# Altium PCB PCB_A5R_2x4_V-CUT.PcbDoc
Units mm, origin at the board's own origin, x right, y up, seen from the top; angles counter-clockwise.
Board outline 153.6 x 133.5 mm, 4 copper layers (Top Layer 1, Top Layer, Bottom Layer, Bottom Layer 1), stack 0.603 mm thick; 4 components, 0 nets, 4 pads, 0 vias.
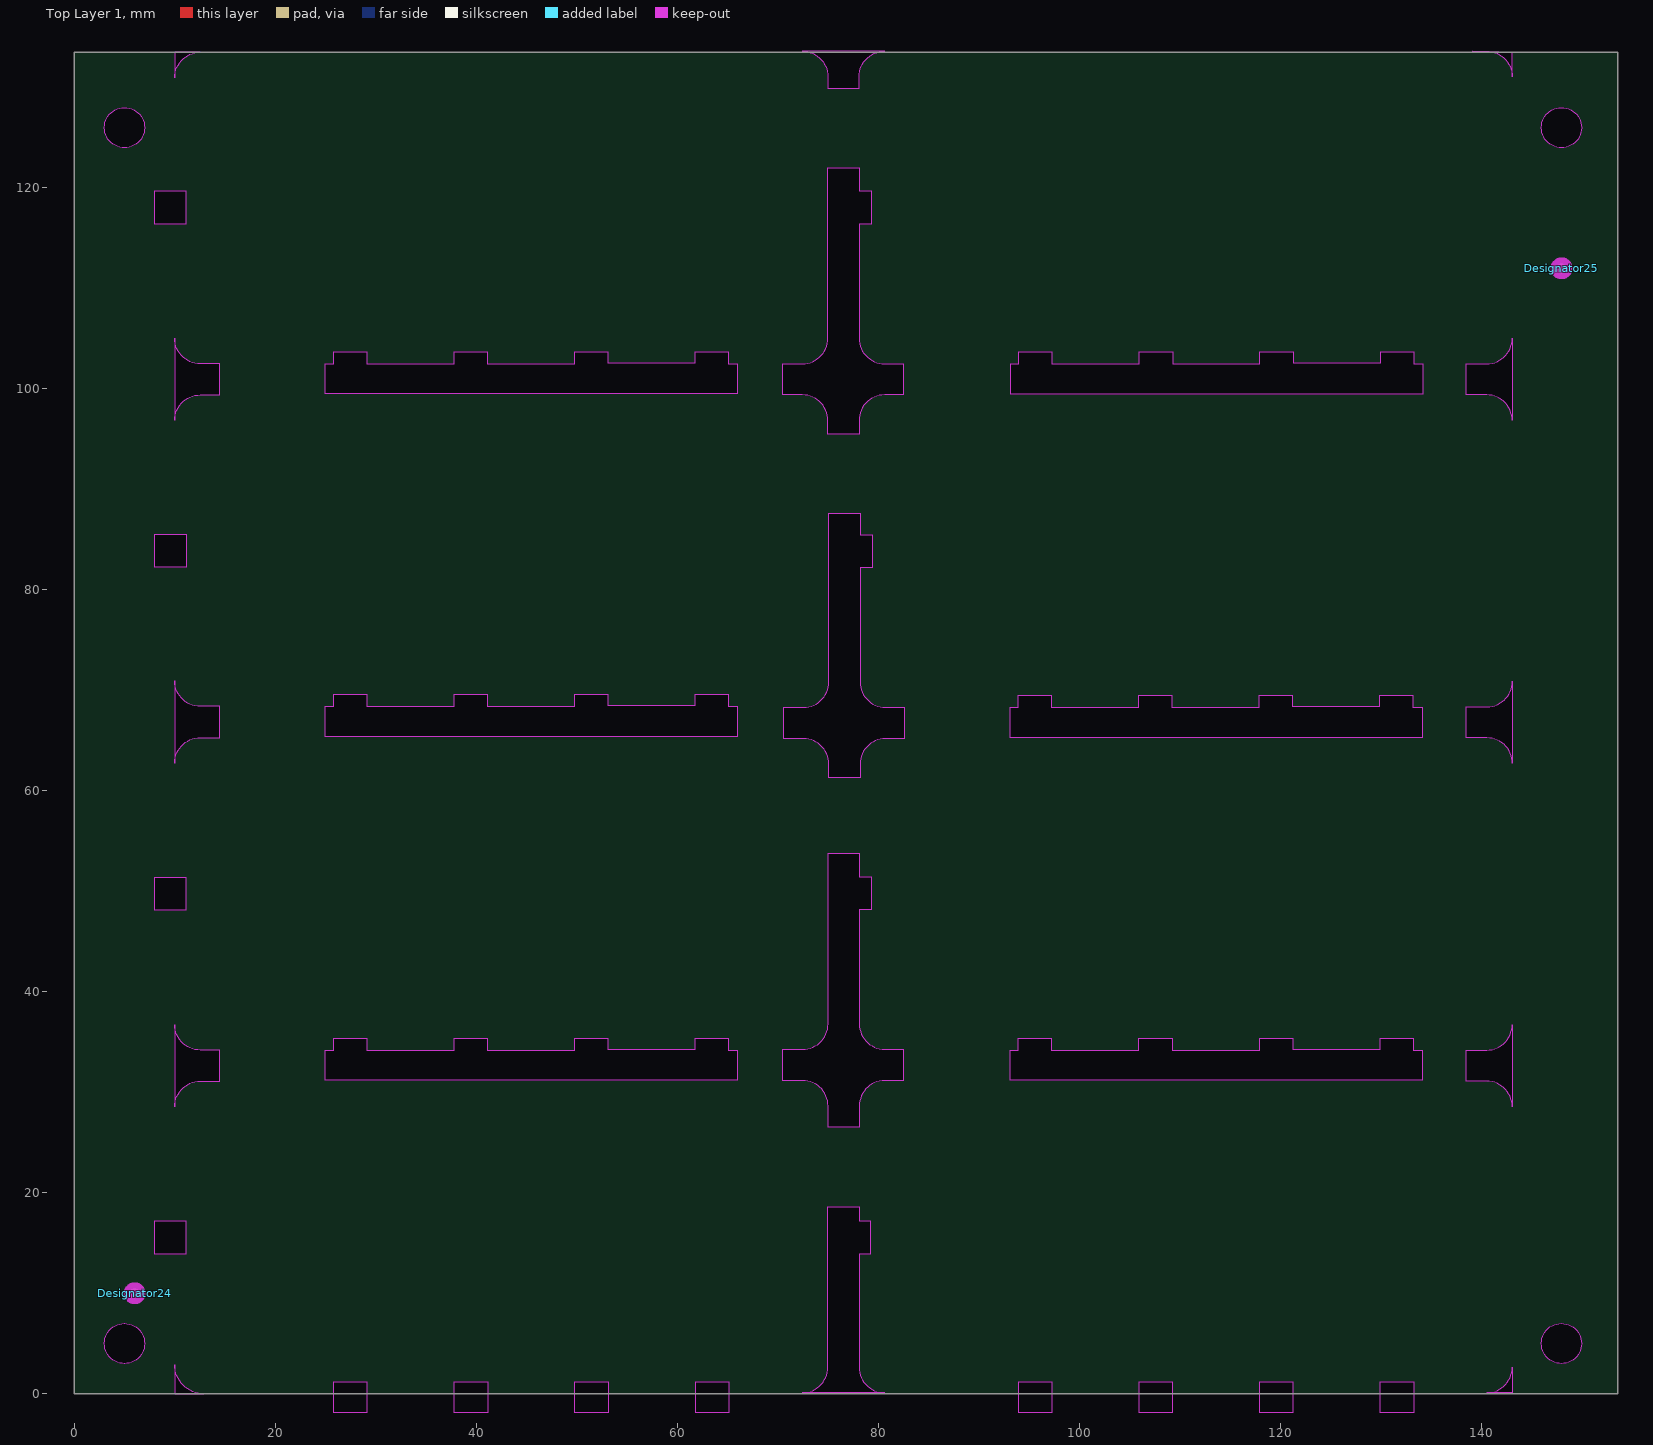
[diagram p0: Top Layer 1 view]
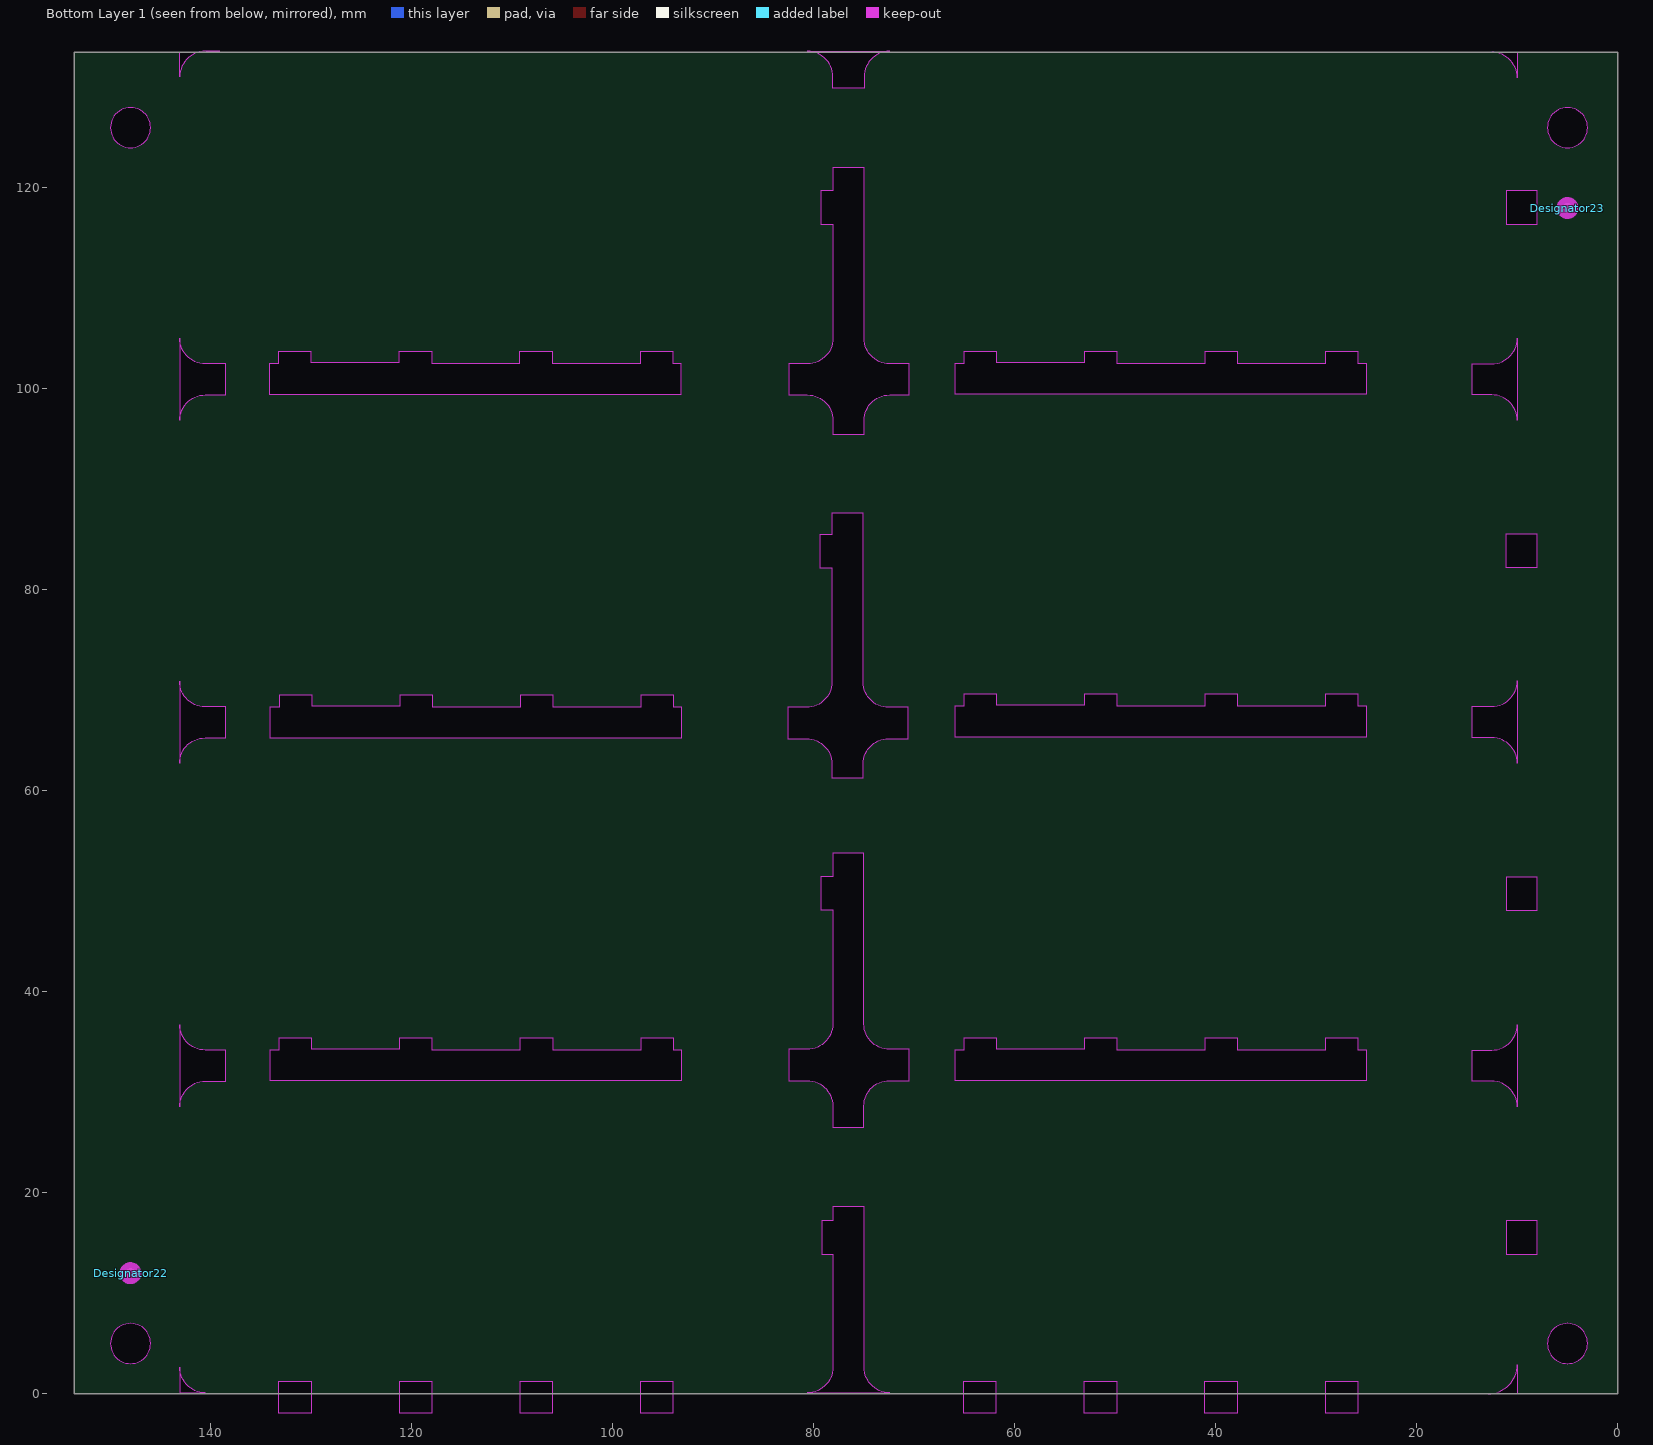
[diagram p1: Bottom Layer 1 view, seen from below]
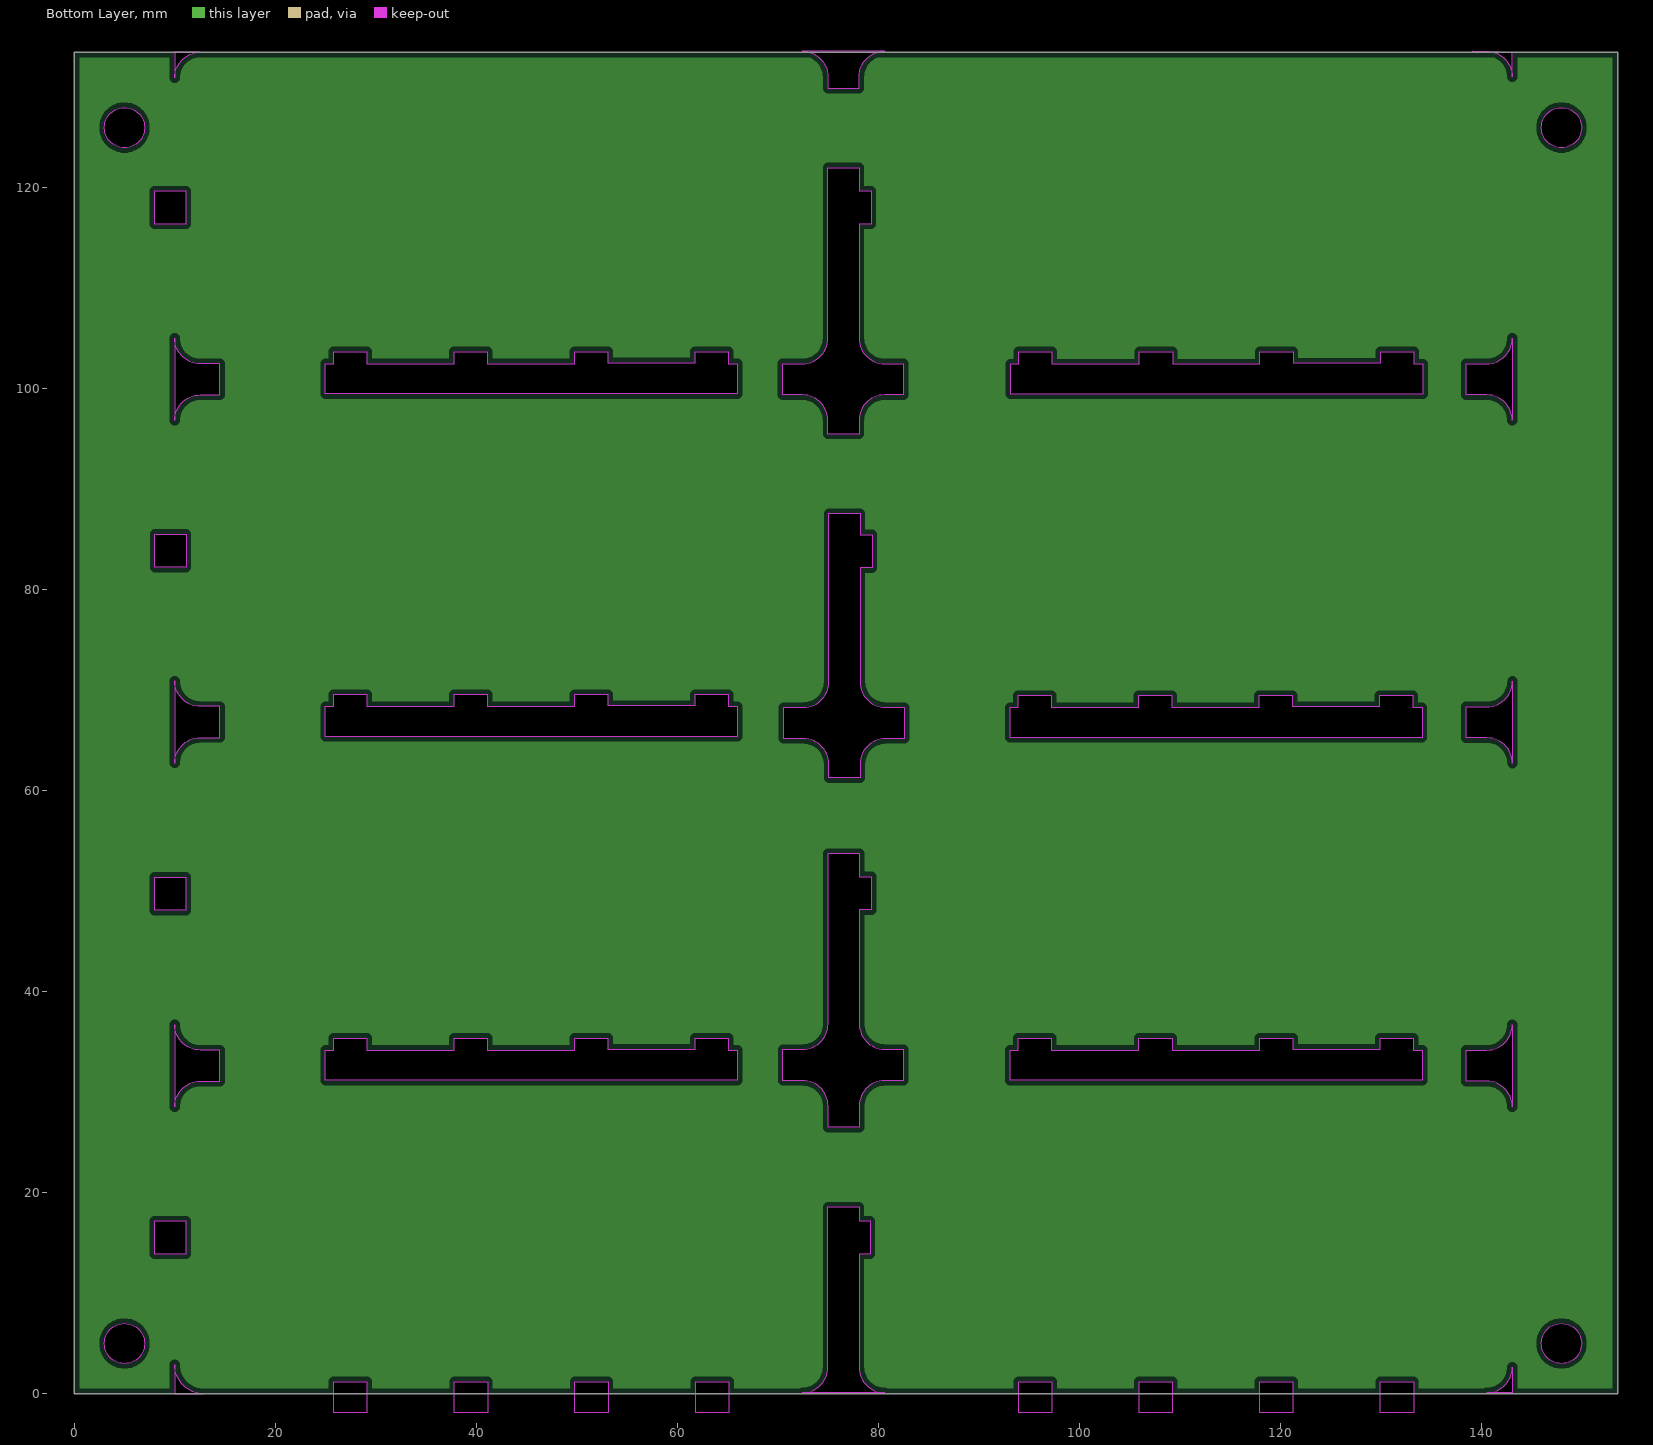
[diagram p2: Bottom Layer, clearances drawn from the general rule]

## Layer stack, top to bottom
Top Solder: solder mask 0.0102, Solder Resist, Dk 3.5
Top Layer 1: signal copper 0.035
Dielectric 2: prepreg 0.0711, PP-006, Dk 4.1
Top Layer: signal copper 0.0356
Dielectric 1: dielectric 0.32, FR-4, Dk 4.8
Bottom Layer: plane copper 0.0356
Dielectric 3: prepreg 0.0711, PP-006, Dk 4.1
Bottom Layer 1: signal copper 0.035
Bottom Solder: solder mask 0.0102, Solder Resist, Dk 3.5

## Board outline
0,0 153.6,0 153.6,133.5 0,133.5
cut-out: 129.984,1.211 133.284,1.211 133.284,-1.889 129.984,-1.889
cut-out: 117.98,1.207 121.28,1.207 121.28,-1.893 117.98,-1.893
cut-out: 105.98,1.199 109.28,1.199 109.28,-1.901 105.98,-1.901
cut-out: 93.972,1.201 97.272,1.201 97.272,-1.899 93.972,-1.899
cut-out: 61.834,1.206 65.134,1.206 65.134,-1.894 61.834,-1.894
cut-out: 49.825,1.217 53.125,1.217 53.125,-1.883 49.825,-1.883
cut-out: 37.825,1.207 41.125,1.207 41.125,-1.893 37.825,-1.893
cut-out: 25.8,1.2 29.1,1.2 29.1,-1.9 25.8,-1.9
cut-out: 8,17.2 11.1,17.2 11.1,13.9 8,13.9
cut-out: 8,51.4 11.1,51.4 11.1,48.1 8,48.1
cut-out: 8.023,85.544 11.123,85.544 11.123,82.244 8.023,82.244
cut-out: 8,119.7 11.1,119.7 11.1,116.4 8,116.4
cut-out: 146,125.97 146,126.019 cw(c147.981,126.019) 147.981,128 148,128 cw(c148,126) 150,126 cw(c148,126) 148,124 147.995,124 cw(c147.995,125.995) 146,125.995
cut-out: 146,4.97 146,5.019 cw(c147.981,5.019) 147.981,7 148,7 cw(c148,5) 150,5 cw(c148,5) 148,3 147.995,3 cw(c147.995,4.995) 146,4.995
cut-out: 3,4.97 3,5.019 cw(c4.981,5.019) 4.981,7 5,7 cw(c5,5) 7,5 cw(c5,5) 5,3 4.995,3 cw(c4.995,4.995) 3,4.995
cut-out: 3,125.97 3,126.019 cw(c4.981,126.019) 4.981,128 5,128 cw(c5,126) 7,126 cw(c5,126) 5,124 4.995,124 cw(c4.995,125.995) 3,125.995
cut-out: 140.56,0.1 ccw(c140.56,2.64) 143.1,2.64 143.1,0.1
cut-out: 139.1,133.6 140.56,133.6 cw(c140.56,131.06) 143.1,131.06 143.1,133.472
cut-out: 72.46,133.6 cw(c72.46,131.06) 75,131.06 75,129.9 78.1,129.9 78.1,131.06 cw(c80.64,131.06) 80.64,133.6
cut-out: 10,0 12.9,0 cw(c12.9,2.9) 10,2.9
cut-out: 10,133.5 10,130.96 cw(c12.54,130.96) 12.54,133.5
cut-out: 75,18.6 78.1,18.6 78.1,17.2 79.2,17.2 79.2,13.9 78.1,13.9 78.1,2.64 ccw(c80.64,2.64) 80.64,0.1 72.46,0.1 ccw(c72.46,2.64) 75,2.64
cut-out: 138.5,34.2 140.56,34.2 ccw(c140.56,36.74) 143.1,36.74 143.1,28.56 ccw(c140.56,28.56) 140.56,31.1 138.5,31.1
cut-out: 138.522,68.367 140.582,68.367 ccw(c140.582,70.907) 143.122,70.907 143.122,62.727 ccw(c140.582,62.727) 140.582,65.267 138.522,65.267
cut-out: 138.5,102.5 140.56,102.5 ccw(c140.56,105.04) 143.1,105.04 143.1,96.86 ccw(c140.56,96.86) 140.56,99.4 138.5,99.4
cut-out: 10,62.76 cw(c12.54,62.76) 12.54,65.3 14.5,65.3 14.5,68.4 12.54,68.4 cw(c12.54,70.94) 10,70.94
cut-out: 10,28.56 cw(c12.54,28.56) 12.54,31.1 14.5,31.1 14.5,34.2 12.54,34.2 cw(c12.54,36.74) 10,36.74
cut-out: 75,122 78.1,122 78.1,119.7 79.3,119.7 79.3,116.4 78.1,116.4 78.1,105.04 ccw(c80.64,105.04) 80.64,102.5 82.5,102.5 82.5,99.4 80.64,99.4 ccw(c80.64,96.86) 78.1,96.86 78.1,95.5 75,95.5 75,96.86 ccw(c72.46,96.86) 72.46,99.4 70.5,99.4 70.5,102.5 72.46,102.5 ccw(c72.46,105.04) 75,105.04
cut-out: 75.1,87.6 78.2,87.6 78.2,85.5 79.4,85.5 79.4,82.2 78.2,82.2 78.2,70.84 ccw(c80.74,70.84) 80.74,68.3 82.6,68.3 82.6,65.2 80.74,65.2 ccw(c80.74,62.66) 78.2,62.66 78.2,61.3 75.1,61.3 75.1,62.66 ccw(c72.56,62.66) 72.56,65.2 70.6,65.2 70.6,68.3 72.56,68.3 ccw(c72.56,70.84) 75.1,70.84
cut-out: 75.02,53.771 78.12,53.771 78.12,51.471 79.32,51.471 79.32,48.171 78.12,48.171 78.12,36.811 ccw(c80.66,36.811) 80.66,34.271 82.52,34.271 82.52,31.171 80.66,31.171 ccw(c80.66,28.631) 78.12,28.631 78.12,26.5 75.02,26.5 75.02,28.631 ccw(c72.48,28.631) 72.48,31.171 70.52,31.171 70.52,34.271 72.48,34.271 ccw(c72.48,36.811) 75.02,36.811
cut-out: 93.122,68.295 93.922,68.295 93.922,69.495 97.222,69.495 97.222,68.295 105.922,68.295 105.922,69.495 109.222,69.495 109.222,68.295 117.922,68.295 117.922,69.495 121.222,69.495 121.222,68.395 129.922,68.395 129.922,69.495 133.222,69.495 133.222,68.295 134.122,68.295 134.122,65.295 93.122,65.295
cut-out: 93.15,34.201 93.95,34.201 93.95,35.401 97.25,35.401 97.25,34.201 105.95,34.201 105.95,35.401 109.25,35.401 109.25,34.201 117.95,34.201 117.95,35.401 121.25,35.401 121.25,34.301 129.95,34.301 129.95,35.401 133.25,35.401 133.25,34.201 134.15,34.201 134.15,31.201 93.15,31.201
cut-out: 93.195,102.487 93.995,102.487 93.995,103.687 97.295,103.687 97.295,102.487 105.995,102.487 105.995,103.687 109.295,103.687 109.295,102.487 117.995,102.487 117.995,103.687 121.295,103.687 121.295,102.587 129.995,102.587 129.995,103.687 133.295,103.687 133.295,102.487 134.195,102.487 134.195,99.487 93.195,99.487
cut-out: 25,34.2 25.8,34.2 25.8,35.4 29.1,35.4 29.1,34.2 37.8,34.2 37.8,35.4 41.1,35.4 41.1,34.2 49.8,34.2 49.8,35.4 53.1,35.4 53.1,34.3 61.8,34.3 61.8,35.4 65.1,35.4 65.1,34.2 66,34.2 66,31.2 25,31.2
cut-out: 25,68.4 25.8,68.4 25.8,69.6 29.1,69.6 29.1,68.4 37.8,68.4 37.8,69.6 41.1,69.6 41.1,68.4 49.8,68.4 49.8,69.6 53.1,69.6 53.1,68.5 61.8,68.5 61.8,69.6 65.1,69.6 65.1,68.4 66,68.4 66,65.4 25,65.4
cut-out: 25,102.5 25.8,102.5 25.8,103.7 29.1,103.7 29.1,102.5 37.8,102.5 37.8,103.7 41.1,103.7 41.1,102.5 49.8,102.5 49.8,103.7 53.1,103.7 53.1,102.6 61.8,102.6 61.8,103.7 65.1,103.7 65.1,102.5 66,102.5 66,99.5 25,99.5
cut-out: 10,96.86 cw(c12.54,96.86) 12.54,99.4 14.5,99.4 14.5,102.5 12.54,102.5 cw(c12.54,105.04) 10,105.04

## Design rules (kind name [scope] priority, off if disabled: settings)
Clearance [All] p1: gap=0.254 ignorepadtopadclearanceinfootprint=FALSE except(0: Arc-Hole Track-Hole SMDPad-Hole THPad-Hole Via-Hole Fill-Hole Poly-Hole Region-Hole Text-Hole)
PlaneClearance [All] p1: clearance=0.508
PlaneConnect [All] p1: planeconnectstyle=Relief reliefexpansion=0.508 reliefentries=4 reliefconductorwidth=0.254 reliefairgap=0.254
PolygonConnect [All] p1: connectstyle=Relief reliefconductorwidth=0.254 reliefentries=4 polygonreliefangle="90 Angle" airgapwidth=0.254
RoutingVias [All] p1: holewidth=0.711 width=1.27 viastyle="Through Hole" minholewidth=0.711 minwidth=1.27 maxholewidth=0.711 maxwidth=1.27
SolderMaskExpansion [All] p1: expansion=0.102 istentingtop=FALSE
Width [All] p1: maxlimit=0.254 minlimit=0.254 preferedwidth=0.254
28 further rules are at their usual default settings.

## Components (designator, comment, footprint, x,y, rotation, side; value= is the part's Value field where it differs from the comment)
Designator22 "Comment" FID10-20 148,12 r180 bottom
Designator23 "Comment" FID10-20 5,118 r180 bottom
Designator24 "Comment" FID10-20 6,10 r0 top
Designator25 "Comment" FID10-20 148,112 r0 top

## Footprints (in the part's own frame and the unit in brackets; to place one, negate y for a bottom-side part, rotate by r counter-clockwise, add the part's x,y. Pads: shape width x height; smd on the part's side, far side on the other; paste and mask are expansions set on the pad)
FID10-20 [mm] "Fiducial mark.  There is nothing to buy or mount."
  round 1 smd mask+0.5: 1(0,0)
  Top Layer 1 keep-out circle w1.178: c0,0 r0.5

## Nets (pads, with @x,y where several pads share a name; then routed paths per layer and width w, separated by ;. In a path a pad name is that pad's centre, name@x,y a point inside that pad or via, vN(x,y) a via of type N, cw(c..) or ccw(c..) an arc to the next point about the centre after c; other vN are vias at no path point)
pads on no net: Designator22.1 Designator23.1 Designator24.1 Designator25.1

## Polygon pours and split planes (outlines as drawn)
no net on Bottom Layer (split plane): 587 vertices, not listed, extent 0.51,0.51 153.09,132.99

## Silkscreen, mask and mechanical layers (free items; w line width, h text height)
Board Outline:
  circle w0.2: c148,5 r2
  circle w0.2: c148,126 r2
  circle w0.2: c5,126 r2
  circle w0.2: c5,5 r2
  lines w0.1: 9.8,134.2 10,133.9 ; 10,135.4 10,133.9 ; 10.2,134.2 10,133.9 ; 74.8,133.9 75,133.6 ; 75,135.1 75,133.6 ; 75.2,133.9 75,133.6 ; 77.9,134.3 78.1,134 ; 78.1,135.5 78.1,134 ; 78.3,134.3 78.1,134 ; 141.5,99.3 141.2,99.5 ; 141.5,99.7 141.2,99.5 ; 141.8,68.2 141.5,68.4 ; 141.8,68.6 141.5,68.4 ; 141.9,65.1 141.6,65.3 ; 141.9,65.5 141.6,65.3 ; 142,102.4 141.7,102.6 ; 142,102.8 141.7,102.6 ; 142.1,30.9 141.8,31.1 ; 142.1,31.3 141.8,31.1 ; 142.1,34 141.8,34.2 ; 142.1,34.4 141.8,34.2 ; 142.7,99.5 141.2,99.5 ; 142.9,134.3 143.1,134 ; 143,68.4 141.5,68.4 ; 143.1,65.3 141.6,65.3 ; 143.1,135.5 143.1,134 ; 143.2,102.6 141.7,102.6 ; 143.3,31.1 141.8,31.1 ; 143.3,34.2 141.8,34.2 ; 143.3,134.3 143.1,134
  lines w0.2: 14.5,31.1 14.5,34.2 ; 14.5,65.3 14.5,68.4 ; 14.5,99.4 14.5,102.5 ; 25,31.2 25,34.2 ; 25,65.4 25,68.4 ; 25,99.5 25,102.5 ; 66,31.1 66,34.2 ; 66,65.3 66,68.4 ; 66,99.4 66,102.5 ; 70.5,31.1 70.5,34.2 ; 70.5,65.3 70.5,68.4 ; 70.5,99.4 70.5,102.5 ; 75,18.6 78.1,18.6 ; 75,26.5 78.1,26.5 ; 75,53.3 78.1,53.3 ; 75,61.2 78.1,61.2 ; 75,87.6 78.1,87.6 ; 75,95.5 78.1,95.5 ; 75,122 78.1,122 ; 75,129.9 78.1,129.9 ; 82.5,31.1 82.5,34.2 ; 82.5,65.3 82.5,68.4 ; 82.5,99.4 82.5,102.5 ; 93,31.2 93,34.2 ; 93,65.4 93,68.4 ; 93,99.5 93,102.5 ; 134,31.1 134,34.2 ; 134,65.3 134,68.4 ; 134,99.4 134,102.5 ; 138.5,31.1 138.5,34.2 ; 138.5,65.3 138.5,68.4 ; 138.5,99.4 138.5,102.5 ; 0,0 0,133.5 10,133.5 10,0 0,0 ; 143.1,0.1 153.1,0.1 153.1,133.5 143.1,133.5 143.1,0.1
  text "v-cut" at 78.544,135.849 h2 r90
  text "v-cut" at 143.544,135.849 h2 r90
  text "v-cut" at 10.444,135.749 h2 r90
  text "v-cut" at 75.444,135.449 h2 r90
  text "v-cut" at 143.549,102.156 h2
  text "CNC" at 10.687,100.355 h2
  text "CNC" at 56.687,100.355 h2
  text "CNC" at 75.387,100.355 h2
  text "CNC" at 33.487,100.255 h2
  text "CNC" at 101.287,100.255 h2
  text "CNC" at 139.787,100.155 h2
  text "v-cut" at 143.049,99.056 h2
  text "v-cut" at 143.349,67.956 h2
  text "CNC" at 77.245,66.287 h2 r90
  text "CNC" at 33.687,66.255 h2
  text "CNC" at 111.987,66.155 h2
  text "CNC" at 140.087,66.155 h2
  text "CNC" at 11.087,65.955 h2
  text "v-cut" at 143.449,64.856 h2
  text "v-cut" at 143.649,33.756 h2
  text "CNC" at 33.687,32.155 h2
  text "CNC" at 111.987,32.155 h2
  text "CNC" at 139.687,32.055 h2
  text "CNC" at 10.887,31.955 h2
  text "CNC" at 77.445,30.987 h2 r90
  text "v-cut" at 143.649,30.656 h2
  text "CNC" at 77.145,1.687 h2 r90

## Panel: embedded boards
"PCB_SoundWedge-A5.pcbdoc" at 9.9,0, 4 rows x 2 columns, spacing 34.156 x 68.153, rotation 0